# Altium PCB tailSensors.PcbDoc
Units mm, origin at the board's own origin, x right, y up, seen from the top; angles counter-clockwise.
Board outline 31.62 x 17.65 mm, 2 copper layers (Top Layer, Bottom Layer); 17 components, 24 nets, 72 pads, 10 vias.
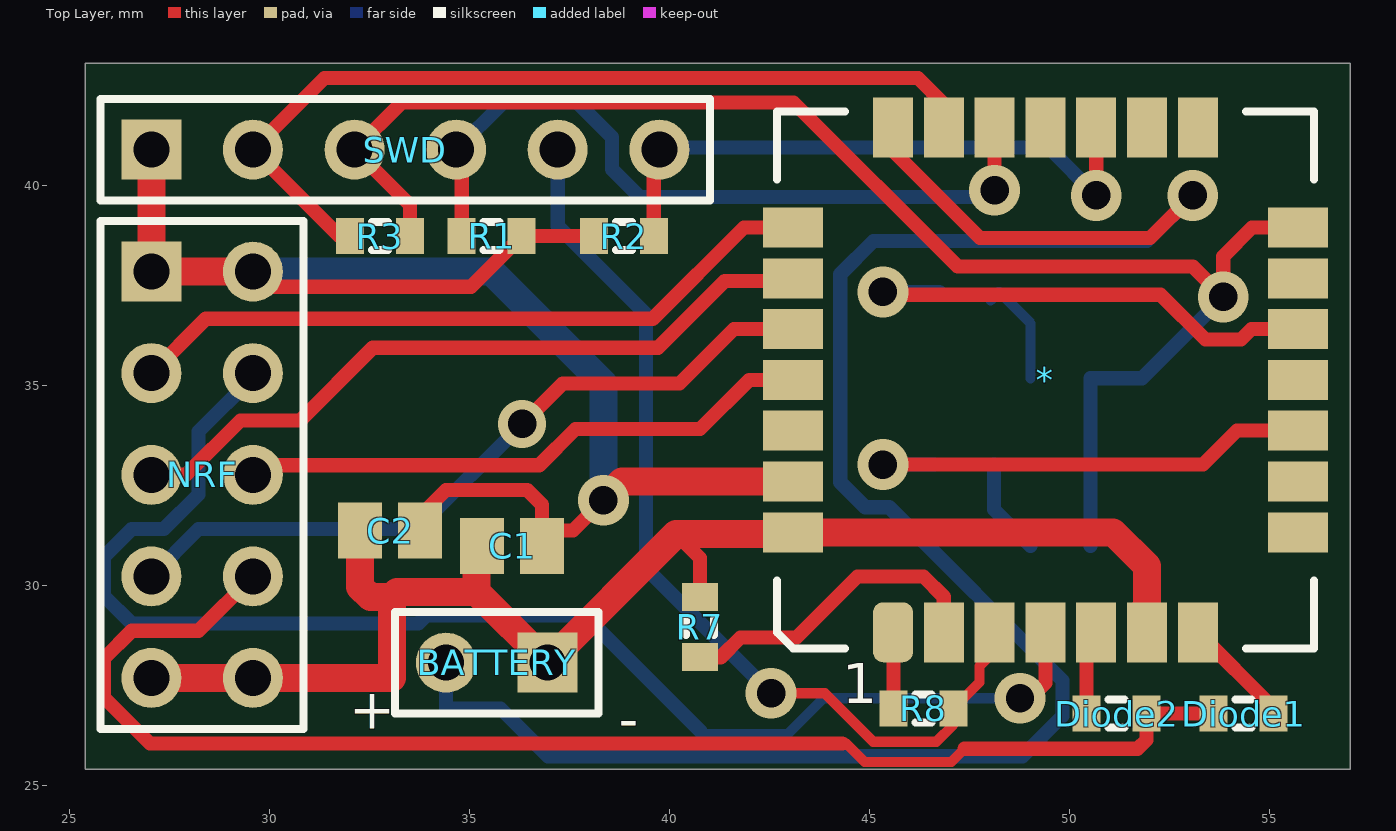
[diagram p0: Top Layer view]
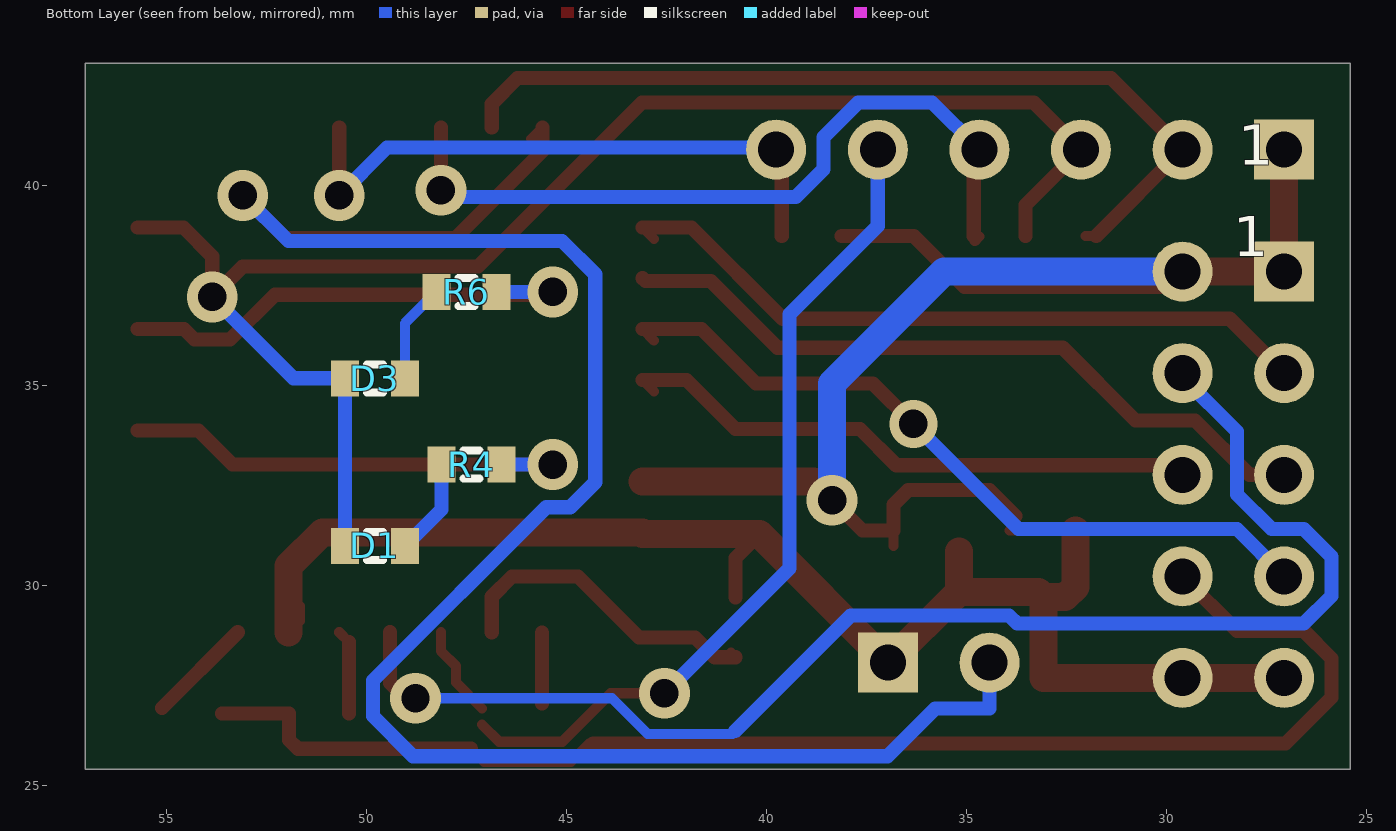
[diagram p1: Bottom Layer view, seen from below]

## Layer stack, top to bottom
Top Solder: solder mask 0.0102, Solder Resist, Dk 3.5
Top Layer: signal copper 0.0356
Dielectric 1: dielectric 0.32, FR-4, Dk 4.8
Bottom Layer: signal copper 0.0356
Bottom Solder: solder mask 0.0102, Solder Resist, Dk 3.5

## Board outline
25.4,25.4 57.023,25.4 57.023,43.053 25.4,43.053

## Design rules (kind name [scope] priority, off if disabled: settings)
Clearance [All] p1: gap=0.254
PolygonConnect [All] p1: connectstyle=Relief reliefconductorwidth=0.254 reliefentries=4 polygonreliefangle="90 Angle" airgapwidth=0.254
RoutingVias [All] p1: holewidth=0.711 width=1.27 viastyle="Through Hole" minholewidth=0.711 minwidth=1.27 maxholewidth=0.711 maxwidth=1.27
SolderMaskExpansion [All] p1: expansion=0.102
Width [All] p1: maxlimit=1 minlimit=0.254 preferedwidth=0.254
30 further rules are at their usual default settings.

## Components (designator, comment, footprint, x,y, rotation, side; value= is the part's Value field where it differs from the comment)
* "INEMOpart" "INEMO - duplicate3" 45.593,28.829 r90 top
BATTERY "Header 2" HDR1X2 36.957,28.067 r180 top
C1 "Cap Pol3" C0805 36.068,30.988 r180 top
C2 "Cap Semi" C0805 33.02,31.369 r0 top
D1 "LED2" J1-0603 49.784,30.988 r0 bottom
D3 "LED2" J1-0603 49.784,35.179 r0 bottom
Diode1 "Diode" J1-0603 54.356,26.797 r0 top
Diode2 "Diode" J1-0603 51.181,26.797 r180 top
NRF "Header 5X2" HDR2X5 27.051,37.846 r270 top
R1 "Res3" J1-0603 35.56,38.735 r0 top
R2 "Res3" J1-0603 38.862,38.735 r180 top
R3 "Res3" J1-0603 32.766,38.735 r180 top
R4 "Res3" J1-0603 47.371,33.02 r180 bottom
R6 "Res3" J1-0603 47.498,37.338 r180 bottom
R7 "Res3" J1-0603 40.767,28.956 r90 top
R8 "Res3" J1-0603 46.355,26.924 r180 top
SWD "Header 6" HDR1X6 27.051,40.894 r0 top

## Footprints (in the part's own frame and the unit in brackets; to place one, negate y for a bottom-side part, rotate by r counter-clockwise, add the part's x,y. Pads: shape width x height; smd on the part's side, far side on the other; paste and mask are expansions set on the pad)
C0805 [mm] "Chip Capacitor, Body 2.0x1.3mm, IPC High Density"
  rect 1.1x1.4 smd: 1(-0.75,0) 2(0.75,0)
  body extent -1.1,-0.72 1.1,0.72, height 1.4
HDR1X2 [mm] "Connector; Header; 2 Position"
  rect 1.5x1.5 hole 0.9: 1(0,0)
  round 1.5 hole 0.9: 2(2.54,0)
  silkscreen extent -1.27,-1.27 3.81,1.27
HDR1X6 [mm] "Connector; Header; 6 Position"
  rect 1.5x1.5 hole 0.9: 1(0,0)
  round 1.5 hole 0.9: 2(2.54,0) 3(5.08,0) 4(7.62,0) 5(10.16,0) 6(12.7,0)
  silkscreen extent -1.27,-1.27 13.97,1.27
HDR2X5 [mm] "Connector; Header; 5x2 Position"
  rect 1.5x1.5 hole 0.9: 1(0,0)
  round 1.5 hole 0.9: 2(0,2.54) 3(2.54,0) 4(2.54,2.54) 5(5.08,0) 6(5.08,2.54) 7(7.62,0) 8(7.62,2.54) 9(10.16,0) 10(10.16,2.54)
  silkscreen extent -1.27,-1.27 11.43,3.81
"INEMO - duplicate3" [mm]
  rrect50% 1.5x1 smd: 1(0,0)
  rect 1.5x1 smd: 2(0,-1.27) 3(0,-2.54) 4(0,-3.81) 5(0,-5.08) 6(0,-6.35) 7(0,-7.62) 15(12.62,-7.62) 16(12.62,-6.35) 17(12.62,-5.08) 18(12.62,-3.81) 19(12.62,-2.54) 20(12.62,-1.27) 21(12.62,0)
  rect 1x1.5 smd: 8(2.5,-10.12) 10(5.04,-10.12) 11(6.31,-10.12) 12(7.58,-10.12) 13(8.85,-10.12) 14(10.12,-10.12) 22(10.12,2.5) 23(8.85,2.5) 24(7.58,2.5) 25(6.31,2.5) 26(5.04,2.5) 27(3.77,2.5) 28(2.5,2.5)
  rect 1x1.5 smd paste+0: 9(3.77,-10.12)
  silkscreen extent -0.4,-10.52 13.02,2.9
J1-0603 [mm] "Chip Resistor, Body 1.6x0.8mm, IPC High Density"
  rect 0.7x0.9 smd: 1(-0.75,0) 2(0.75,0)
  silkscreen extent -0.2,-0.35 0.2,0.35, body extent -0.85,-0.48 0.85,0.48, height 0.9

## Part data
*: library part Component_1
BATTERY: "Header, 2-Pin"
C1: "Polarized Capacitor (Surface Mount)"
C2: "Capacitor (Semiconductor SIM Model)"
D1 D3: "Typical RED, GREEN, YELLOW, AMBER GaAs LED"
Diode1 Diode2: "Default Diode"
NRF: "Header, 5-Pin, Dual row"
R1 R2 R3 R4 R6 R7 R8: "Resistor"
SWD: "Header, 6-Pin"

## Via types
v1: diameter 1.27, hole 0.711, Top Layer to Bottom Layer, 9 vias
v2: diameter 1.2, hole 0.711, Top Layer to Bottom Layer, 1 vias

## Nets (pads, with @x,y where several pads share a name; then routed paths per layer and width w, separated by ;. In a path a pad name is that pad's centre, name@x,y a point inside that pad or via, vN(x,y) a via of type N, cw(c..) or ccw(c..) an arc to the next point about the centre after c; other vN are vias at no path point)
Net*_1: *.1 R8.2 | length 1.8
  Top Layer w0.354: R8.2@45.605,27.051 *.1@45.605,28.817
Net*_2: *.2 R7.1 | length 8.2
  Top Layer w0.254: R7.1 R7.1@40.882,28.321
  Top Layer w0.354: R7.1 41.287,28.206 41.783,28.702 43.18,28.702 44.704,30.226 46.355,30.226 46.863,29.718 *.2
Net*_3: *.3 R8.1 SWD.5 | length 23.5
  Top Layer w0.254: v1@42.672,27.432 v1(42.545,27.305) 43.885,27.305 45.097,26.093 46.678,26.093 R8.1@47.105,26.52 ; R8.1 47.752,27.571 47.752,27.98 48.133,28.361 *.3
  Bottom Layer w0.354: SWD.5 37.211,38.989 39.42,36.78 39.42,30.43 v1(42.545,27.305)
Net*_4: *.4 NRF.4 | length 34.4
  Top Layer w0.354: v1@48.895,27.051 49.403,27.559 *.4
  Bottom Layer w0.254: 40.774,26.36 40.845,26.289 42.966,26.289 43.855,27.178 v1(48.768,27.178)
  Bottom Layer w0.354: NRF.4 29.591,35.206 28.232,33.847 28.232,32.277 27.362,31.407 26.562,31.407 25.87,30.715 25.87,29.737 26.562,29.045 33.725,29.045 33.928,29.248 37.886,29.248 40.774,26.36
Net*_5: *.5 Diode2.2 | length 2.1
  Top Layer w0.254: *.5@50.431,28.587 *.5
  Top Layer w0.354: Diode2.2 *.5@50.431,28.587
Net*_6: *.6 *.28 BATTERY.1 C1.2 C2.1 NRF.9 NRF.10 R7.2 | length 37
  Top Layer w0.254: *.28@43.093,31.282 *.28 ; *.6@51.654,29.487 51.654,29.118 *.6
  Top Layer w0.354: 40.172,31.282 40.767,30.687 R7.2
  Top Layer w0.7: NRF.9 NRF.10 33.063,27.686 33.063,29.705 ; C2.1 32.27,29.96 32.525,29.705 33.063,29.705 ; C1.2@35.184,30.854 35.184,29.84 ; *.28@43.093,31.282 40.172,31.282 BATTERY.1 35.184,29.84 ; *.28 51.094,31.329 51.943,30.48 *.6 ; 33.063,29.705 33.199,29.84 35.184,29.84
Net*_7: *.7 Diode1.2 | length 2.7
  Top Layer w0.254: *.7@53.201,28.817 *.7
  Top Layer w0.354: *.7 Diode1.2@55.106,26.936
Net*_10: *.10 R4.2 | length 12
  Top Layer w0.354: v1(45.339,33.02) 53.34,33.02 54.189,33.869 *.10
  Bottom Layer w0.354: v1(45.339,33.02) R4.2
Net*_11: *.11
Net*_12: *.12 R6.2 | length 12.3
  Top Layer w0.354: v1@45.41,37.267 52.284,37.267 53.406,36.145 54.29,36.145 54.554,36.409 *.12
  Bottom Layer w0.354: v1(45.339,37.338) R6.2
Net*_14: *.14 D1.2 D3.2 R3.1 SWD.3 | length 38.5
  Top Layer w0.354: R3.1 33.516,39.509 SWD.3 33.312,42.075 43.107,42.075 47.209,37.973 53.086,37.973 v1(53.848,37.211) 53.848,38.227 54.57,38.949 *.14
  Bottom Layer w0.354: D1.2 D3.2 51.816,35.179 v1(53.848,37.211)
Net*_17: *.17 R2.1 SWD.6 | length 15.4
  Top Layer w0.254: SWD.6@39.612,40.755 SWD.6
  Top Layer w0.354: R2.1 SWD.6@39.612,40.755 ; v1(50.673,39.751) *.17
  Bottom Layer w0.354: SWD.6 39.801,40.944 49.48,40.944 v1(50.673,39.751)
Net*_19: *.19 R1.1 SWD.4 | length 19.2
  Top Layer w0.254: R1.1@34.671,38.723 R1.1@34.786,38.608
  Top Layer w0.354: R1.1 SWD.4@34.81,40.755 ; v1(48.133,39.878) *.19
  Bottom Layer w0.354: SWD.4 35.852,42.075 37.7,42.075 38.57,41.205 38.57,40.405 39.262,39.713 47.968,39.713 v1(48.133,39.878)
Net*_20: *.20 R3.2 SWD.2 | length 22.2
  Top Layer w0.254: R3.2@31.75,38.735 R3.2
  Top Layer w0.354: R3.2@31.75,38.735 SWD.2 31.38,42.683 46.219,42.683 46.863,42.039 *.20
Net*_21: *.21 BATTERY.2 | length 51.3
  Top Layer w0.254: *.21 *.21@45.882,41.16
  Top Layer w0.354: *.21 45.593,40.859 47.767,38.685 52.02,38.685 v1(53.086,39.751)
  Bottom Layer w0.254: BATTERY.2 BATTERY.2@34.918,28.067 ; v1@52.959,39.751 v1(53.086,39.751)
  Bottom Layer w0.354: BATTERY.2 34.417,26.924 35.776,26.924 36.969,25.731 48.829,25.731 49.834,26.736 49.834,27.62 45.5,31.954 44.897,31.954 44.273,32.578 44.273,37.78 45.101,38.608 51.943,38.608 v1(53.086,39.751)
Net*_22: *.22 NRF.3 | length 18
  Top Layer w0.254: *.22@42.804,38.66 *.22
  Top Layer w0.354: NRF.3 28.41,36.665 39.586,36.665 41.87,38.949 *.22
Net*_23: *.23 NRF.5 | length 18.1
  Top Layer w0.354: NRF.5 27.921,32.766 29.28,34.125 30.772,34.125 32.588,35.941 39.722,35.941 41.387,37.607 43.021,37.607 *.23
Net*_24: *.24 NRF.7 | length 19.8
  Top Layer w0.254: *.24@42.804,36.12 *.24
  Top Layer w0.354: v2@36.322,33.655 v2(36.322,34.036) 37.338,35.052 40.259,35.052 41.616,36.409 *.24
  Bottom Layer w0.254: v2@36.322,33.655 v2(36.322,34.036)
  Bottom Layer w0.354: NRF.7 28.232,31.407 33.693,31.407 v2(36.322,34.036)
Net*_25: *.25 NRF.6 | length 14.8
  Top Layer w0.254: *.25@42.804,34.85 *.25
  Top Layer w0.354: NRF.6@29.683,32.674 30.014,33.005 36.749,33.005 37.653,33.909 40.767,33.909 41.997,35.139 *.25
Net*_27: *.27 C1.1 C2.2 NRF.1 NRF.2 R1.2 R2.2 SWD.1 | length 39.7
  Top Layer w0.254: NRF.2 NRF.2@29.972,37.465 ; C2.2@33.77,31.738 C2.2 C2.2@33.91,31.369 ; R1.2 R1.2@36.588,38.735 ; C1.1 C1.1@36.818,31.369
  Top Layer w0.354: NRF.2@29.972,37.465 35.04,37.465 R1.2 R2.2 ; C2.2@33.77,31.738 34.417,32.385 36.449,32.385 36.818,32.016 36.818,31.369 37.592,31.369 v1(38.354,32.131)
  Top Layer w0.7: SWD.1 NRF.1 NRF.2 ; v1(38.354,32.131) 38.822,32.599 *.27
  Bottom Layer w0.7: NRF.2 35.56,37.846 38.354,35.052 v1(38.354,32.131)
NetD1_1: D1.1 R4.1 | length 2.4
  Bottom Layer w0.354: R4.1 48.121,31.901 D1.1
NetD2_1: 
NetD3_1: D3.1 R6.1 | length 2.8
  Bottom Layer w0.254: R6.1@48.034,37.124 R6.1 49.034,36.552 D3.1
NetDiode1_1: Diode1.1 Diode2.1 NRF.8 | length 34.7
  Top Layer w0.254: 44.425,26.047 44.887,25.585 47.05,25.585 47.381,25.916
  Top Layer w0.354: NRF.8 28.232,28.867 26.562,28.867 25.87,28.175 25.87,27.197 27.02,26.047 44.323,26.047 ; 47.381,25.916 51.708,25.916 51.931,26.139 Diode2.1 Diode1.1
pads on no net: *.8 *.9 *.13 *.15 *.16 *.18 *.26

## Silkscreen, mask and mechanical layers (free items; w line width, h text height)
Top Overlay:
  text "1" at 44.323,27.051 h1
  text "+" at 32.004,26.416 h1
  text "-" at 38.735,26.162 h1
Bottom Overlay:
  text "1" at 28.194,40.513 h1
  text "1" at 28.321,38.227 h1